# Altium PCB SRM_DOUBLE_V2_POWER.PCBDOC (part 1 of 2)
Units mil, origin at the board's own origin, x right, y up, seen from the top; angles counter-clockwise.
Board outline 17360 x 20010 mil, 2 copper layers (Top Layer, Bottom Layer); 233 components, 244 nets, 635 pads, 83 vias.
Unrouted connection lines stored in the file: 49.
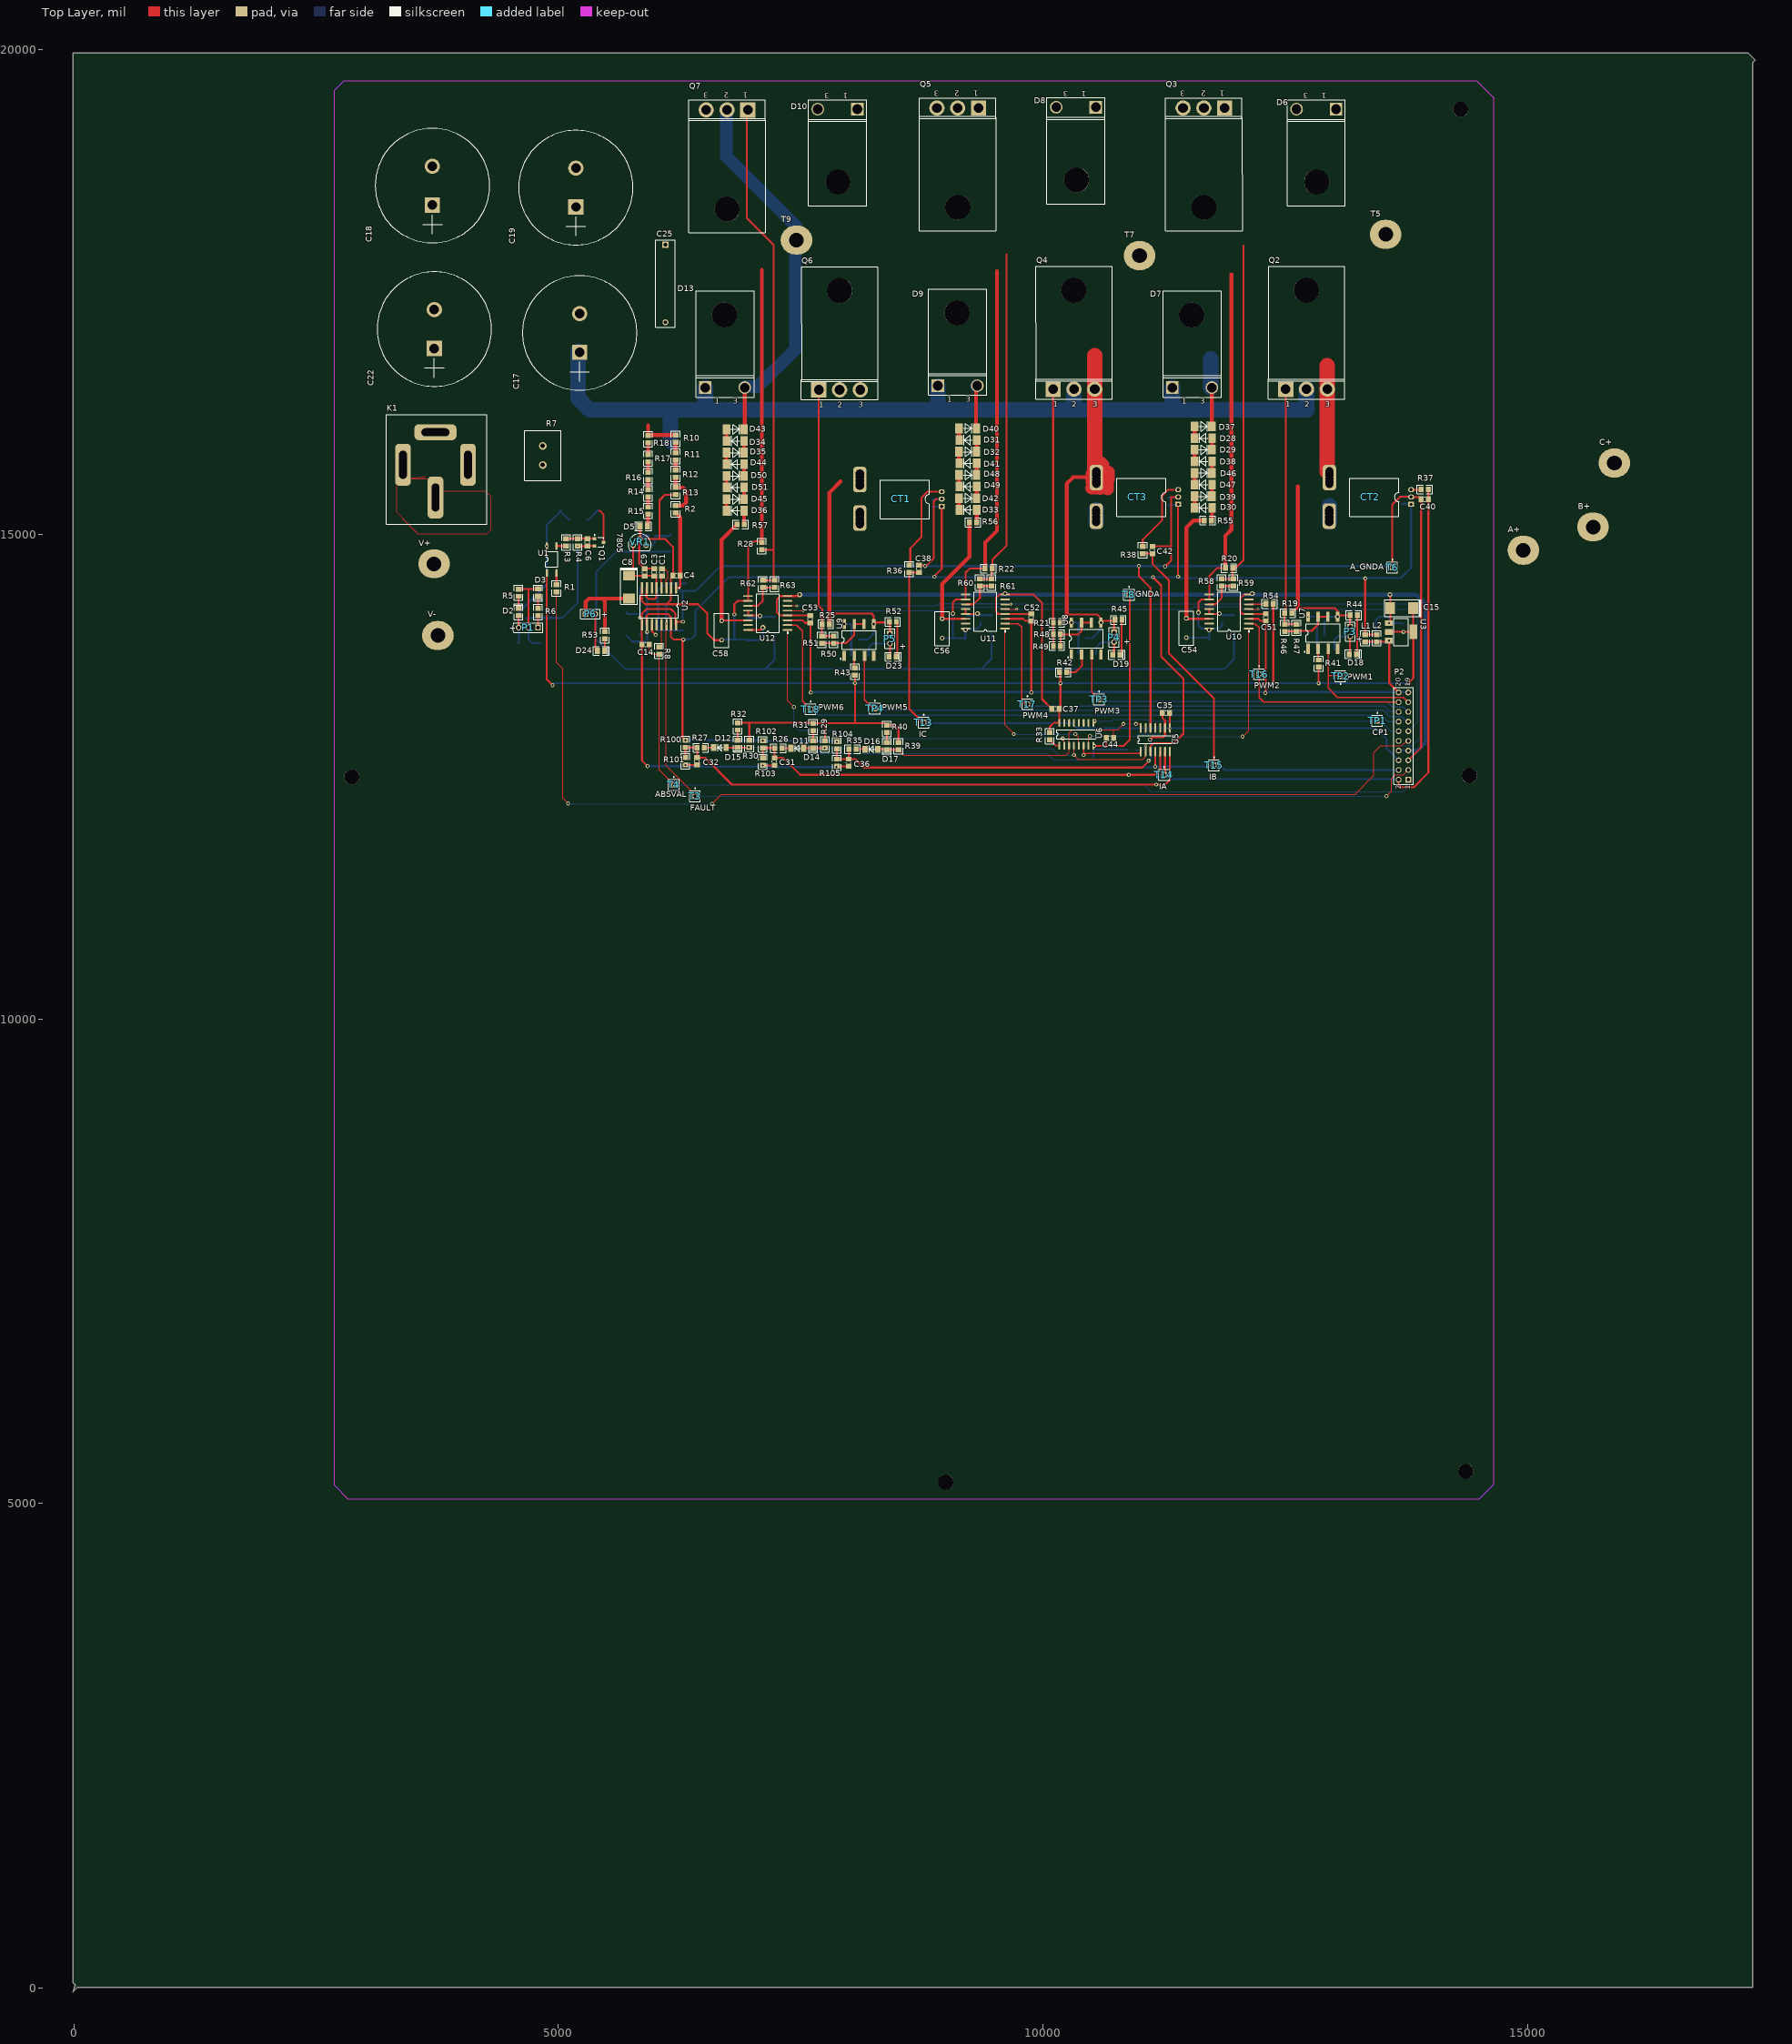
[diagram p0: Top Layer view]
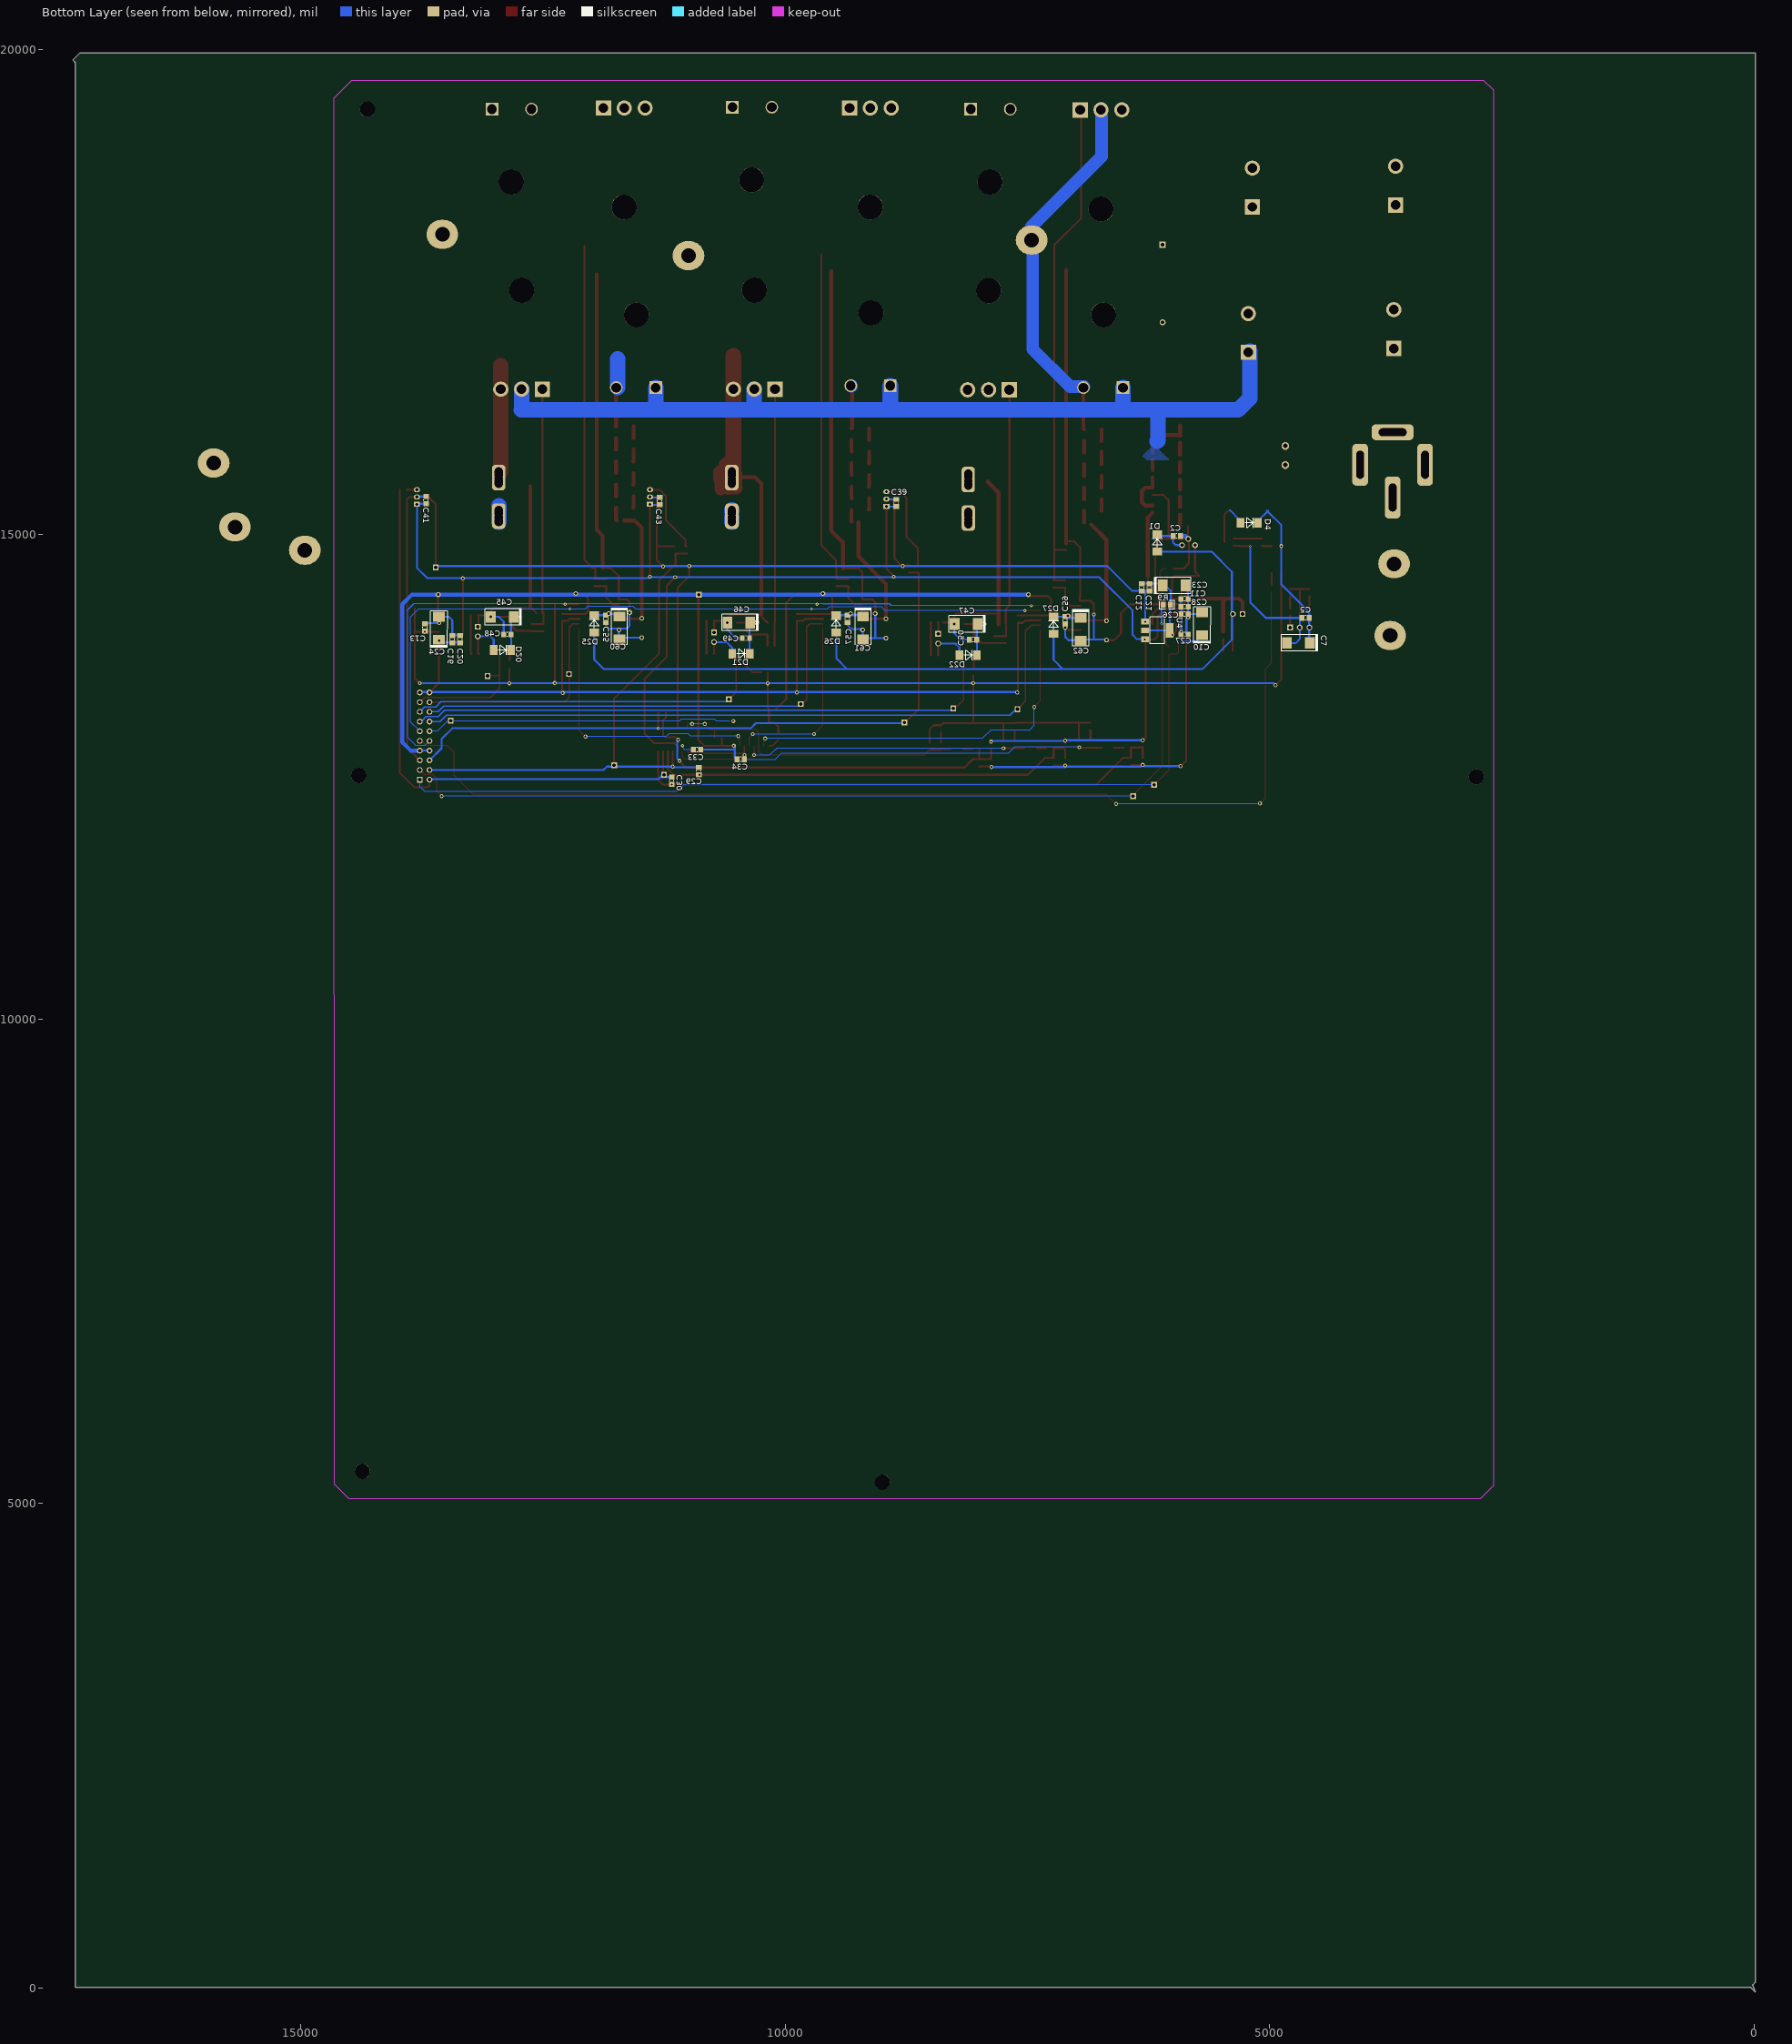
[diagram p1: Bottom Layer view, seen from below]

## Layer stack, top to bottom
Top Layer: signal copper 1.4
Dielectric: dielectric 12.6, FR-4, Dk 4.8
Bottom Layer: signal copper 1.4

## Board outline
-10,-40 40,10 17325,10 17325,19870 17350,19895 17275,19970 -10,19970 -10,60 15,35

## Design rules (kind name [scope] priority, off if disabled: settings)
Clearance [All] p1: gap=12
ComponentClearance [All] p1: gap=10 collisioncheckmode=3 verticalgap=10
HoleSize [All] p1: absolutevalues=TRUE maxlimit=500 minlimit=1 maxpercent=80.000 minpercent=20.000
PolygonConnect [All] p1: connectstyle=Relief reliefconductorwidth=10 reliefentries=4 polygonreliefangle="90 Angle"
RoutingVias [All] p1: holewidth=28 width=50 viastyle="Through Hole" minholewidth=10 minwidth=10 maxholewidth=28 maxwidth=50
SolderMaskExpansion [All] p1: expansion=4
TestPointUsage [All] p1: valid=0 allowmultiple=FALSE
Testpoint [All] p1: side=15 testpointundercomponent=TRUE minsize=40 maxsize=100 preferedsize=60 minholesize=0 maxholesize=40 preferedholesize=32 testpointgrid=1 style=1023 order=0-112345678
Width [All] p1: maxlimit=400 minlimit=10 preferedwidth=10
17 further rules are at their usual default settings.

## Classes and differential pairs
component class POWER_1.1: C1 C2 C3 C4 C5 C6 C7 C8 C9 C10 C11 C12 C13 C14 C15 C16 C17 C18 C19 C20 C21 C22 C23 C24 C25 C26 C27 C28 C29 C30 C31 C32 C33 C34 C35 C36 C37 C38 C39 C40 C41 C42 C43 C44 CT1 CT2 CT3 D1 D2 D3 D4 D5 D6 D7 D8 D9 D10 D11 D12 D13 D14 D15 D16 D17 Designator6 F1 K1 L1 L2 P1 P2 Q1 Q2 Q3 Q4 Q5 Q6 Q7 R1 R2 R3 R4 R5 R6 R7 R8 R9 R10 R11 R12 R13 R14 R15 R16 R17 R18 R19 R20 R21 R22 R25 R26 R27 R28 R29 R30 R31 R32 R33 R35 R36 R37 R38 R39 R40 R100 R101 R102 R103 R104 R105 T3 T4 T6 T7 T8 T9 T10 T11 T12 T13 T14 T15 TP1 U1 U2 U3 U4 U5 U6 V+ V- VR1
component class POWER_1.2: C45 C46 C47 C48 C49 C50 C51 C52 C53 C54 C55 C56 C57 C58 C59 C60 C61 C62 D18 D19 D20 D21 D22 D23 D24 D25 D26 D27 D28 D29 D30 D31 D32 D33 D34 D35 D36 D37 D38 D39 D40 D41 D42 D43 D44 D45 D46 D47 D48 D49 D50 D51 P3 P4 P5 P6 R41 R42 R43 R44 R45 R46 R47 R48 R49 R50 R51 R52 R53 R54 R55 R56 R57 R58 R59 R60 R61 R62 R63 T16 T17 T18 TP2 TP3 TP4 U7 U8 U9 U10 U11 U12
component class POWER_2.1: C63 C64 C65 C66 C67 C68 C69 C70 C71 C72 C73 C74 C75 C76 C77 C78 C79 C80 C81 C82 C83 C84 C85 C86 C87 C88 C89 C90 C91 CT4 CT5 CT6 D52 D53 D54 D55 D56 D57 D58 D59 D60 D61 D62 D63 D64 D65 F2 K2 L3 L4 P7 Q4 Q9 Q10 Q11 Q12 Q13 Q14 R64 R65 R66 R67 R68 R69 R70 R71 R72 R73 R74 R75 R76 R79 R80 R81 R82 R83 R84 R85 R86 R87 R89 R90 R91 R92 R93 R94 R200 R201 R202 R203 R204 R205 T19 T20 T21 T22 T23 T24 T25 T26 T27 T28 T29 T30 T31 TP5 U13 U14 U15 U16
component class POWER_2.2: C92 C93 C94 C95 C96 C97 C98 C99 C100 C101 C102 C103 C104 C105 C106 C107 C108 C109 D66 D67 D68 D69 D70 D71 D72 D73 D74 D75 D76 D77 D78 D79 D80 D81 D82 D83 D84 D85 D86 D87 D88 D89 D90 D91 D92 D93 D94 D95 D96 D97 D98 P8 P9 P10 R95 R96 R97 R98 R99 R106 R107 R108 R109 R110 R111 R112 R113 R114 R115 R116 R300 R301 R302 R303 R304 R305 T32 T33 T34 TP6 TP7 TP8 U17 U18 U19 U20 U21 U22

## Components (designator, comment, footprint, x,y, rotation, side; value= is the part's Value field where it differs from the comment)
A+ "Comment" TEM3 14920,14700 r270 top
B+ "Comment" TEM3 15640,14940 r270 top
C1 "104" C2012-0805 6070,14610 r90 top
C2 "104" C2012-0805 5960,14985 r0 bottom
C3 "104" C2012-0805 5990,14610 r90 top
C4 "103" C2012-0805 6220,14575 r180 top
C5 "104" C2012-0805 4630,14140 r0 bottom
C6 "104" C2012-0805 5300,14920 r90 top
C7 "10uF/25V" C_10UF/25V 4730,13880 r270 bottom
C8 "10uF/25V" C_10UF/25V 5730,14430 r0 top
C9 "104" C2012-0805 5890,14610 r270 top
C10 "104" C2012-0805 5876.96,14176.96 r180 bottom
C11 "104" C2012-0805 5880,14335 r0 bottom
C12 "104" C2012-0805 6320,14455 r90 bottom
C13 "104" C2012-0805 13715,14040 r270 bottom
C14 "104" C2012-0805 5900,13865 r0 top
C15 "10uF/25V" C_10UF/25V 13675,14240 r270 top
C16 "104" C2012-0805 13435,13920 r270 bottom
C17 "470uF" Rb400mil-450V 5220,17080 r90 top
C18 "470uF" Rb400mil-450V 3700,18600 r90 top
C19 "470uF" Rb400mil-450V 5180,18580 r90 top
C20 "104" C2012-0805 13355,13920 r270 bottom
C21 "104" C2012-0805 6240,14455 r90 bottom
C22 "470uF" Rb400mil-450V 3720,17120 r90 top
C23 "10uF/25V" C_10UF/25V 5960,14475 r90 bottom
C24 "10uF/25V" C_10UF/25V 13575,14060 r0 bottom
C25 "1uF" Rb800mil 6105,17590 r90 top
C26 "104" C2012-0805 5880,14255 r0 bottom
C27 "104" C2012-0805 5880,13965 r0 bottom
C28 "10uF/25V" C_10UF/25V 5700,14105 r0 bottom
C29 "102" C2012-0805 10890,12560 r270 bottom
C30 "102" C2012-0805 11170,12460 r270 bottom
C31 "104" C2012-0805 7230,12655 r90 top
C32 "104" C2012-0805 6430,12660 r90 top
C33 "102" C2012-0805 10910,12780 r0 bottom
C34 "102" C2012-0805 10460,12680 r180 bottom
C35 "102" C2012-0805 11270,13160 r180 top
C36 "104" C2012-0805 7995,12645 r90 top
C37 "104" C2012-0805 10130,13200 r0 top
C38 "104" C2012-0805 8720,14645 r270 top
C39 "104" C2012-0805 8855,15325 r90 bottom
C40 "104" C2012-0805 13940,15365 r0 top
C41 "104" C2012-0805 13705,15355 r90 bottom
C42 "104" C2012-0805 11130,14840 r270 top
C43 "104" C2012-0805 11295,15345 r90 bottom
C44 "102" C2012-0805 10690,12900 r0 top
C45 "10uF/25V" C_10UF/25V 12946.31,14148.33 r270 bottom
C46 "10uF/25V" C_10UF/25V 10505,14090 r270 bottom
C47 "10uF/25V" C_10UF/25V 8160,14075 r270 bottom
C48 "104" C2012-0805 12866.31,13968.33 r0 bottom
C49 "104" C2012-0805 10405,13930 r0 bottom
C50 "104" C2012-0805 8060,13915 r0 bottom
C51 "104" C2012-0805 12300,14145 r270 top
C52 "104" C2012-0805 9880,14145 r270 top
C53 "104" C2012-0805 7600,14125 r270 top
C54 "101" Rad-0.2 11480,14035 r270 top
C55 "104" C2012-0805 11850,14130 r90 bottom
C56 "101" Rad-0.2 8960,14030 r270 top
C57 "104" C2012-0805 9355,14130 r90 bottom
C58 "101" Rad-0.2 6685,14010 r270 top
C59 "104" C2012-0805 7110,14115 r90 bottom
C60 "10uF/25V" C_10UF/25V 11710,14010 r180 bottom
C61 "10uF/25V" C_10UF/25V 9195,14010 r180 bottom
C62 "10uF/25V" C_10UF/25V 6950,13995 r180 bottom
C+ "Comment" TEM3 15860,15600 r270 top
CT1 "ACS758" ACS758-LCB-050U-PFF 8655,15365 r90 top
CT2 "ACS758" ACS758-LCB-050U-PFF 13500,15385 r90 top
CT3 "ACS758" ACS758-LCB-050U-PFF 11095,15385 r90 top
D1 "IN4007" DIODE4007 6160,14905 r90 bottom
D2 "" LED-SMD 4590,14200 r270 top
D3 "" LED-SMD 4790,14400 r90 top
D4 "IN4007" DIODE4007 5220,15120 r180 bottom
D5 "LED" LED-SMD 5880,15085 r0 top
D6 "MUR60120" DIO40A1200V 12820,18900 r90 top
D7 "MUR60120" DIO40A1200V 11540,17005 r270 top
D8 "MUR60120" DIO40A1200V 10340,18920 r90 top
D9 "MUR60120" DIO40A1200V 9120,17025 r270 top
D10 "MUR60120" DIO40A1200V 7880,18900 r90 top
D11 "IN4148" IN4148 7470,12795 r180 top
D12 "IN4148" IN4148 6670,12800 r180 top
D13 "MUR60120" DIO40A1200V 6720,17005 r270 top
D14 "OCA" LED-SMD 7630,12835 r90 top
D15 "OCA" LED-SMD 6850,12840 r90 top
D16 "IN4148" IN4148 8235,12785 r180 top
D17 "OCA" LED-SMD 8390,12815 r90 top
D18 "" LED-SMD 13200,13765 r180 top
D19 "" LED-SMD 10759,13760 r180 top
D20 "IN4007" DIODE4007 12926.31,13808.33 r180 bottom
D21 "IN4007" DIODE4007 10465,13770 r180 bottom
D22 "IN4007" DIODE4007 8120,13755 r180 bottom
D23 "" LED-SMD 8451,13740 r180 top
D24 "" LED-SMD 5440,13800 r180 top
D25 "IN4007" DIODE4007 11970,14070 r90 bottom
D26 "IN4007" DIODE4007 9475,14070 r90 bottom
D27 "IN4007" DIODE4007 7230,14055 r90 bottom
D28 "UF4007" DIODE4007 11665,15995 r180 top
D29 "UF4007" DIODE4007 11645,15875 r0 top
D30 "UF4007" DIODE4007 11665,15275 r180 top
D31 "UF4007" DIODE4007 9235,15975 r180 top
D32 "UF4007" DIODE4007 9215,15855 r0 top
D33 "UF4007" DIODE4007 9235,15255 r180 top
D34 "UF4007" DIODE4007 6835,15965 r180 top
D35 "UF4007" DIODE4007 6815,15845 r0 top
D36 "UF4007" DIODE4007 6835,15245 r180 top
D37 "UF4007" DIODE4007 11645,16115 r0 top
D38 "UF4007" DIODE4007 11665,15755 r180 top
D39 "UF4007" DIODE4007 11645,15395 r0 top
D40 "UF4007" DIODE4007 9215,16095 r0 top
D41 "UF4007" DIODE4007 9235,15735 r180 top
D42 "UF4007" DIODE4007 9215,15375 r0 top
D43 "UF4007" DIODE4007 6815,16085 r0 top
D44 "UF4007" DIODE4007 6835,15725 r180 top
D45 "UF4007" DIODE4007 6815,15365 r0 top
D46 "UF4007" DIODE4007 11645,15635 r0 top
D47 "UF4007" DIODE4007 11665,15515 r180 top
D48 "UF4007" DIODE4007 9215,15615 r0 top
D49 "UF4007" DIODE4007 9235,15495 r180 top
D50 "UF4007" DIODE4007 6815,15605 r0 top
D51 "UF4007" DIODE4007 6835,15485 r180 top
K1 "Comment" Relay2 4460,15620 r0 top
L1 "10uH" R2012-0805 13325,13930 r90 top
L2 "10uH" R2012-0805 13445,13930 r90 top
P1 "Header 3" HDR1X3 4790,14040 r180 top
P2 "Header 10X2" HDR2X10 13770,12470 r90 top
P3 "Header 2" HDR1X2 13171.31,14048.33 r270 top
P4 "Header 2" HDR1X2 10734,13990 r270 top
P5 "Header 2" HDR1X2 8421,13975 r270 top
P6 "Header 2" HDR1X2 5280,14180 r0 top
Q1 "8050" NPN8050 5420,14920 r270 top
Q2 "Comment" "IGBT TO247 40A 1200V" 12720,16920 r90 top
Q3 "Comment" "IGBT TO247 40A 1200V" 11660,18980 r270 top
Q4 "Comment" "IGBT TO247 40A 1200V" 10320,16920 r90 top
Q5 "Comment" "IGBT TO247 40A 1200V" 9120,18980 r270 top
Q6 "Comment" "IGBT TO247 40A 1200V" 7902,16914 r90 top
Q7 "Comment" "IGBT TO247 40A 1200V" 6740,18960 r270 top
R1 "1K" R2012-0805 4980,14445 r270 top
R2 "39R" R2012-0805 6210,15262.6 r270 top
R3 "3K" R2012-0805 5080,14920 r270 top
R4 "1K" R2012-0805 5200,14920 r90 top
R5 "3K" R2012-0805 4590,14400 r270 top
R6 "3K" R2012-0805 4790,14200 r90 top
R7 "47R" AXIAL-1*1.3 4840,15820 r270 top
R8 "1K" R2012-0805 6040,13800 r270 top
R9 "4K7" R2012-0805 6060,14275 r180 bottom
R10 "1M" R2012-0805 6210,15987.6 r90 top
R11 "1M" R2012-0805 6210,15807.6 r90 top
R12 "1M" R2012-0805 6210,15627.6 r90 top
R13 "3K" R2012-0805 6210,15447.6 r90 top
R14 "10K" R2012-0805 5925,15425 r90 top
R15 "10K" R2012-0805 5925,15245 r90 top
R16 "10K" R2012-0805 5925,15605 r270 top
R17 "10K" R2012-0805 5925,15785 r270 top
R18 "10K" R2012-0805 5925,15985 r270 top
R19 "10K" R2012-0805 12530,14190 r180 top
R20 "10K" R2012-0805 11920,14655 r0 top
R21 "10K" R2012-0805 10145,14090 r180 top
R22 "10K" R2012-0805 9440,14650 r0 top
R25 "10K" R2012-0805 7760,14075 r180 top
R26 "510K" R2012-0805 7270,12795 r180 top
R27 "510K" R2012-0805 6470,12800 r180 top
R28 "10K" R2012-0805 7100,14880 r270 top
R29 "4K7" R2012-0805 7750,12835 r90 top
R30 "4K7" R2012-0805 6970,12840 r90 top
R31 "1K" R2012-0805 7630,13015 r90 top
R32 "1K" R2012-0805 6850,13020 r90 top
R33 "1K" R2012-0805 10070,12920 r90 top
R35 "510K" R2012-0805 8035,12785 r180 top
R36 "1K" R2012-0805 8620,14645 r270 top
R37 "1K" R2012-0805 13940,15465 r0 top
R38 "1K" R2012-0805 11030,14840 r270 top
R39 "4K7" R2012-0805 8510,12815 r90 top
R40 "1K" R2012-0805 8390,12995 r90 top
R41 "200R" R2012-0805 12846.31,13668.33 r270 top
R42 "200R" R2012-0805 10210,13580 r180 top
R43 "200R" R2012-0805 8060,13585 r270 top
R44 "3K" R2012-0805 13206.31,14168.33 r0 top
R45 "3K" R2012-0805 10779,14120 r0 top
R46 "100R" R2012-0805 12496.32,14038.33 r270 top
R47 "100R" R2012-0805 12616.31,14038.33 r270 top
R48 "100R" R2012-0805 10145,13970 r0 top
R49 "100R" R2012-0805 10145,13850 r0 top
R50 "100R" R2012-0805 7840,13915 r270 top
R51 "100R" R2012-0805 7720,13915 r270 top
R52 "3K" R2012-0805 8451,14100 r0 top
R53 "3K" R2012-0805 5480,13960 r270 top
R54 "10K" R2012-0805 12340,14285 r0 top
R55 "100R" R2012-0805 11700,15145 r180 top
R56 "100R" R2012-0805 9280,15125 r180 top
R57 "100R" R2012-0805 6880,15105 r180 top
R58 "100R" R2012-0805 11845,14505 r270 top
R59 "100R" R2012-0805 11965,14505 r270 top
R60 "100R" R2012-0805 9350,14505 r270 top
R61 "100R" R2012-0805 9470,14505 r270 top
R62 "100R" R2012-0805 7110,14490 r270 top
R63 "100R" R2012-0805 7230,14490 r270 top
R100 "20K" R2012-0805 6310,12840 r270 top
R101 "10K" R2012-0805 6310,12660 r270 top
R102 "20K" R2012-0805 7110,12835 r270 top
R103 "10K" R2012-0805 7110,12655 r270 top
R104 "20K" R2012-0805 7875,12825 r270 top
R105 "10K" R2012-0805 7875,12645 r270 top
T3 "FAULT" PIN1 6410,12300 r0 top
T4 "ABSVAL" PIN1 6192.23,12417.77 r0 top
T5 "Comment" TEM3 13500,17960 r270 top
T6 "A_GNDA" PIN1 13605,14660 r0 top
T7 "Comment" TEM3 10960,17740 r270 top
T8 "GNDA" PIN1 10890,14380 r0 top
T9 "Comment" TEM3 7420,17900 r270 top
T13 "IC" PIN1 8770,13060 r0 top
T14 "IA" PIN1 11250,12520 r0 top
T15 "IB" PIN1 11765,12620 r0 top
T16 "PWM2" PIN1 12230,13560 r0 top
T17 "PWM4" PIN1 9840,13250 r0 top
T18 "PWM6" PIN1 7602.5,13197.5 r0 top
TP1 "CP1" PIN1 13450,13080 r0 top
TP2 "PWM1" PIN1 13070,13540 r180 top
TP3 "PWM3" PIN1 10580,13300 r0 top
TP4 "PWM5" PIN1 8265,13205 r0 top
U1 "TLP181" TLP181 4880,14605 r90 top
U2 "HCPL788J" HCPL788J 6040,14260 r90 top
U3 "1117-3.3V" 1117-3.3V 13695,14000 r270 top
U4 "1117-3.3V" 1117-3.3V 6160,14015 r270 bottom
U5 "LM339" LM339 11010,12760 r90 top
U6 "74HC174" 74HC174 10170,12820 r90 top
U7 "HCPL3120" HCPL3120 12886.31,13988.33 r90 top
U8 "HCPL3120" HCPL3120 10445,13930 r90 top
U9 "HCPL3120" HCPL3120 8100,13915 r90 top
U10 "HCPL316J" HCPL316J 12150,14030 r180 top
U11 "HCPL316J" HCPL316J 9635,14030 r180 top
U12 "HCPL316J" HCPL316J 7390,14015 r180 top
V+ "Comment" TEM3 3680,14560 r270 top
V- "Comment" TEM3 3720,13820 r270 top
VR1 "7805" MC78L05 5840,14905 r270 top

## Footprints (in the part's own frame and the unit in brackets; to place one, negate y for a bottom-side part, rotate by r counter-clockwise, add the part's x,y. Pads: shape width x height; smd on the part's side, far side on the other; paste and mask are expansions set on the pad)
74HC174 [mm]
  rect 2x0.5 smd: 1(0,0)
  oval 2x0.5 smd: 2(0,-1.27) 3(0,-2.54) 4(0,-3.81) 5(0,-5.08) 6(0,-6.35) 7(0,-7.62) 8(0,-8.89) 9(6,-8.89) 10(6,-7.62) 11(6,-6.35) 12(6,-5.08) 13(6,-3.81) 14(6,-2.54) 15(6,-1.27) 16(6,0)
  silkscreen extent 1.84,-9.53 4.17,0.64
1117-3.3V [mil]
  rect 59x79 smd: 1(-85.81,-124.94) 2(4.74,-124.94) 3(95.29,-124.94)
  rect 150x79 smd: 4(4.07,128.61)
  silkscreen extent -135,-73 145,77
ACS758-LCB-050U-PFF [mm]
  rect 1.3x1.6 hole 0.8: 1(-1.88,-7.62)
  oval 1.3x1.6 hole 0.8: 2(0.036,-7.62) 3(1.952,-7.62)
  rrect50% 3.5x3.5 hole 2.2: 4(3.531,13.818) 4(4.039,13.818) 4(4.826,13.818) 4(5.74,13.818) 4(6.375,13.818) 4(6.731,13.818) 5(-6.553,13.843) 5(-6.045,13.843) 5(-5.258,13.843) 5(-4.343,13.843) 5(-3.708,13.843) 5(-3.353,13.843)
  silkscreen extent -5.11,-4.43 5,8.48
AXIAL-1*1.3 [mm] "1cm*1.3cm  5W立式水泥电阻"
  round 2 hole 1.2: 1(-2.388,-0.025) 2(2.616,-0.025)
  silkscreen extent -6.43,-4.72 6.68,4.72
C2012-0805 [mm]
  rect 1.3x1.5 smd: 1(-0.95,0) 2(0.95,0)
  silkscreen extent -0.1,-0.58 0.1,0.58
C_10UF/25V [mil] "3mm*10mm焊盘"
  rect 120x100 smd: 1(-1,145) 2(-1,-91)
  silkscreen extent -87,-148 84,227
DIO40A1200V [mil]
  rect 130x130 hole 100: 1(489,-205)
  round 130 hole 100: 3(489,203)
  round 260 hole 260: ""(-261,-6)
  silkscreen extent -508,-300 587,300
DIODE4007 [mil] "间距5.08，宽2.54，贴片"
  rect 78.74x100 smd: 1(-81,0) 2(99,0)
  silkscreen extent -36,-50 60,50
HCPL316J [mm]
  rect 2.5x0.457 smd: 1(0.635,0)
  oval 2.5x0.457 smd: 2(0.635,-1.27) 3(0.635,-2.54) 4(0.635,-3.81) 5(0.635,-5.08) 6(0.635,-6.35) 7(0.635,-7.62) 8(0.635,-8.89) 9(10.995,-8.89) 10(10.995,-7.62) 11(10.995,-6.35) 12(10.995,-5.08) 13(10.995,-3.81) 14(10.995,-2.54) 15(10.995,-1.27) 16(10.995,0)
  silkscreen extent 0.4,-9.53 8.8,0.94
HCPL788J [mil]
  rect 118.11x23.62 smd: 1(190,-174) 2(190,-124) 3(190,-74) 4(190,-24) 5(190,26) 6(190,76) 7(190,126) 8(190,176) 9(-190,176) 10(-190,126) 11(-190,76) 12(-190,26) 13(-190,-24) 14(-190,-74) 15(-190,-124) 16(-190,-174)
  silkscreen extent -118,-212 195,198
HCPL3120 [mil]
  rect 104.65x35.75 smd: 1(-168.33,151.31) 2(-168.33,46.31) 3(-168.33,-58.69) 4(-168.33,-153.69) 5(161.67,-153.69) 6(161.67,-53.69) 7(161.67,46.31) 8(161.67,151.31)
  silkscreen extent -203,-179 93,191
HDR1X2 [mm] "Connector; Header; 2 Position"
  rect 1.5x1.5 hole 0.9: 1(0,0)
  round 1.5 hole 0.9: 2(2.54,0)
  silkscreen extent -1.27,-1.27 3.81,1.27
HDR1X3 [mm] "Connector; Header; 3 Position"
  rect 1.5x1.5 hole 0.9: 1(0,0)
  round 1.5 hole 0.9: 2(2.54,0) 3(5.08,0)
  silkscreen extent -1.27,-1.27 6.35,1.27
HDR2X10 [mm] "Connector; Header; 10x2 Position"
  rect 1.5x1.5 hole 0.9: 1(0,0)
  round 1.5 hole 0.9: 2(0,2.54) 3(2.54,0) 4(2.54,2.54) 5(5.08,0) 6(5.08,2.54) 7(7.62,0) 8(7.62,2.54) 9(10.16,0) 10(10.16,2.54) 11(12.7,0) 12(12.7,2.54) 13(15.24,0) 14(15.24,2.54) 15(17.78,0) 16(17.78,2.54) 17(20.32,0) 18(20.32,2.54) 19(22.86,0) 20(22.86,2.54)
  silkscreen extent -1.27,-1.27 24.13,3.81
"IGBT TO247 40A 1200V" [mil]
  rect 157.56x157.56 hole 100: 1(-421,215)
  round 157.56 hole 100: 2(-421,0.43) 3(-421,-214.13)
  round 260 hole 260: ""(601.61,1.18)
  silkscreen extent -523,-395 847,396
IN4148 [mm] "贴片"
  rect 1.4x1.8 smd: 1(-1.549,0) 2(1.753,0)
  silkscreen extent -0.76,-0.89 0.89,0.89
LED-SMD [mm] "贴片LED，0805"
  rect 1.3x1.6 smd: 1(0.975,0) 2(-0.925,0)
  silkscreen extent -2.21,-1.15 2.03,1.15
LM339 [mm] "SO14"
  rect 2.5x0.5 smd: 1(0,0)
  oval 2.5x0.5 smd: 2(0,-1.27) 3(0,-2.54) 4(0,-3.81) 5(0,-5.08) 6(0,-6.35) 7(0,-7.62) 8(6.2,-7.62) 9(6.2,-6.35) 10(6.2,-5.08) 11(6.2,-3.81) 12(6.2,-2.54) 13(6.2,-1.27) 14(6.2,0)
  silkscreen extent 2.08,-8.25 4.12,0.64
MC78L05 [mm] "小电流三端稳压"
  round 1.5 hole 0.9: 1(0.381,1.651) 2(-1.27,0) 3(0.381,-1.778)
  silkscreen extent -2.61,-3.03 1.79,2.97
NPN8050 [mm] "SOT23"
  rect 0.85x1 smd: 1(-0.95,-1.2) 2(0.95,-1.2) 3(0,1.2)
  silkscreen extent -2.05,-1.32 1.28,1.2
PIN1 [mm] "Connector; Plug"
  rect 1.5x1.5 hole 0.9: 1(0,0)
  silkscreen extent -1.4,-1.4 1.4,2.17
R2012-0805 [mm]
  rect 1.3x1.5 smd: 1(-0.95,0) 2(0.95,0)
  silkscreen extent -2,-1.15 2,1.15
Rad-0.2 [mm] "Jumper Wire; 2 Leads"
  round 1.2 hole 0.7: 1(-2.54,0) 2(2.54,0)
  silkscreen extent -4.44,-1.91 4.44,1.91
Rb400mil-450V [mm] "脚距10mm，轮廓直径30mm，450V铝电解"
  rect 4x4 hole 2.5: 1(-5.08,0)
  round 4 hole 2.5: 2(5.08,0)
  silkscreen extent -15,-15 15,15
Rb800mil [mm] "脚距20mm，630V CBB"
  round 1.549 hole 0.898: 1(-10.16,0)
  rect 1.6x1.6 hole 1: 2(10.16,0)
  silkscreen extent -11.43,-2.54 11.43,2.54
Relay2 [mm] "12V   80A  电磁继电器"
  rrect50% 11x4.1 hole 2 slot 7.3 at 0 deg: 1(-18.508,11.05)
  rrect50% 4.1x11 hole 2 slot 7.3 at 90 deg: 2(-27.011,2.546) 3(-9.996,2.546) 4(-18.503,-6.029)
  silkscreen extent -31.34,-12.99 -5.01,15.7
TEM3 [mil]
  oval 298.9x326.46 hole 150.73: 1(-137.76,36.85)
TLP181 [mm]
  rect 2x0.6 smd: 1(0,0)
  oval 2x0.6 smd: 3(0,-2.54) 4(7,-2.54) 6(7,0)
  silkscreen extent 1.52,-2.84 5.54,0.28

## Part data
C1 C2 C3 C4 C5 C6 C9 C10 C11 C12 C13 C14 C16 C20 C21 C26 C27 C29 C30 C31 C32 C33 C34 C35 C36 C37 C38 C39 C40 C41 C42 C43 C44 C48 C49 C50 C51 C52 C53 C54 C55 C56 C57 C58 C59: library part Cap, "普通电容"
C7 C8 C15 C23 C24 C28 C45 C46 C47 C60 C61 C62: library part "Cap tan", "钽电解"
C17 C18 C19 C22: library part "Cap pol1", "大电解电容"
C25: library part "Cap CBB", "CBB电容"
D1 D4 D20 D21 D22 D25 D26 D27 D28 D29 D30 D31 D32 D33 D34 D35 D36 D37 D38 D39 D40 D41 D42 D43 D44 D45 D46 D47 D48 D49 D50 D51: library part "Diode IN4007", "普通整流二极管"
D2 D3 D14 D15 D17 D18 D19 D23 D24: library part LED
D6 D7 D8 D9 D10 D13: library part "Diode HFA08TB60"
D11 D12 D16: library part "Diode IN4148", "开关二极管"
L1 L2: library part Inductor
P1: "Header, 3-Pin"
P2: "Header, 10-Pin, Dual row"
P3 P4 P5 P6: "Header, 2-Pin"
Q1: library part NPN8050
R1 R2 R3 R4 R5 R6 R7 R8 R9 R10 R11 R12 R13 R14 R15 R16 R17 R18 R19 R20 R21 R22 R25 R26 R27 R28 R29 R30 R31 R32 R33 R35 R36 R37 R38 R39 R40 R41 R42 R43 R44 R45 R46 R47 R48 R49 R50 R51 R52 R53 R54 R55 R56 R57 R58 R59 R60 R61 R62 R63 R100 R101 R102 R103 R104 R105: library part Res
T3 T4 T6 T8 T13 T14 T15 T16 T17 T18 TP1 TP2 TP3 TP4: library part TP, "测试脚"
U3 U4: library part 1117
U6: "带公共时钟和复位六D触发器"
VR1: library part VR78, "三端稳压"

## Free pads (board coordinates)
  round 157.48 hole 157.48: 0(2868,12499) 0(8996,5221) 0(14311,19388) 0(14363,5334) 0(14399,12513)

## Via types
v1: diameter 40, hole 20, Top Layer to Bottom Layer, 55 vias
v2: diameter 50, hole 28, Top Layer to Bottom Layer, 17 vias
v3: diameter 30, hole 15, Top Layer to Bottom Layer, 10 vias
v4: diameter 20, hole 10, Top Layer to Bottom Layer, 1 vias

## Nets (pads, with @x,y where several pads share a name; then routed paths per layer and width w, separated by ;. In a path a pad name is that pad's centre, name@x,y a point inside that pad or via, vN(x,y) a via of type N, cw(c..) or ccw(c..) an arc to the next point about the centre after c; other vN are vias at no path point)
+5VA: C16.2 C20.2 C24.1 C51.2 C52.2 C53.2 L1.1 L2.1 P2.19 P2.20 U3.3 U10.3 U11.3 U12.3 | length 10164.2
  Top Layer w20: U12.3@7365,14115 7520,14115 7547.4,14087.6 C53.2@7600,14087.6 7600,13370 v1@7600,13365 ; U11.3@9610,14130 9795,14130 9817.4,14107.6 C52.2@9880,14107.6 v1(9880,13370) v1@9885,13365 ; U10.3@12125,14130 12225,14130 12247.4,14107.6 C51.2@12300,14107.6 12300,13370 v1(12295,13365) ; L1.1@13325,13892.6 L2.1@13445,13892.6 13557.95,13892.6 v1(13570.06,13904.71) ; U3.3@13574,13915 13574,13904.71 13574,13466 P2.20@13670,13370
  Bottom Layer w20: v1@7595,13360 v1(7605,13370) 7610,13375 9880,13375 12295,13375 13670,13375 13765,13375 P2.19@13770,13370 ; 13390,13882.6 C16.2@13435,13882.6 C24.1@13547.95,13882.6 ; v1(13570.06,13904.71) C24.1@13547.95,13882.6 ; C24.1@13582.95,13882.6 13574,13882.6 13570.06,13882.6 C24.1@13547.95,13882.6
+5VB: 
+12: C5.1 C7.1 D2.1 D4.2 K1.2 P1.3 U1.6 | length 1804.3
  Top Layer w20: P1.3@4590,14040 D2.1@4590,14161.6
  Bottom Layer w20: C7.1@4585,13881 4592.6,13888.6 4592.6,14040 P1.3@4592.6,14042.6 ; P1.3@4590,14040 P1.3@4592.6,14042.6 ; 5017,15245 5017,15244 5022.5,15238.5 ; 5030,15246 5022.5,15238.5 ; D4.2@5108,15153 5022.5,15238.5 ; P1.3@4592.6,14042.6 C5.1@4592.6,14140 4592.6,14197.6 4880,14485 v1(4880,14880) 4880,15096 5022.5,15238.5
-12: P1.1 R6.1 | length 122.6
  Top Layer w20: P1.1@4790,14040 R6.1@4790,14162.6
/FAULT: P2.3 R9.1 T3.1 U2.14 | length 9652.5
  Top Layer w10: U2.14@6109,14070 6109,12616 T3.1@6410,12315 ; v1(13545,12300) 13595,12350 13595,12480 13635,12520 13720,12520 P2.3@13770,12570
  Bottom Layer w10: T3.1@6410,12300 v1(13545,12300) ; P2.3@13755,12570 P2.3@13770,12570
  Bottom Layer w20: R9.1@6097.4,14275 R9.1@6109,14263.4 ; v3@6109,14070 v3@6109,14080 ; v3(6115,14080) R9.1@6115,14263.4
A+3.3VA: C12.2 C21.2 C23.1 R9.2 U2.11 U4.2 U4.4 | length 1137.7
  Top Layer w20: U2.11@5964,14070 5964,14005 v1(6004,13965)
  Bottom Layer w20: U4.4@6031.39,14010.93 6284.26,14010.93 U4.2@6284.94,14010.26 ; C12.2@6320,14492.4 C21.2@6240,14492.4 6123.4,14492.4 C23.1@6105,14474 6074,14474 6022.6,14422.6 R9.2@6022.6,14275 6030.39,14267.21 6030.39,14070.93 U4.4@6029.46,14070 ; U4.4@6029.46,14070 6029.46,14032.86 6031.39,14030.93 6031.39,14068.07 U4.4@6029.46,14070
A+5VA: C10.1 C11.2 C26.2 C27.2 C28.1 C39.1 C41.1 C43.1 CT1.1 CT2.1 CT3.1 L1.2 L2.2 R100.1 R102.1 R104.1 U2.10 U2.15 U4.3 U5.3 | length 17421
  Top Layer w20: U2.10@5909,14070 5909,14156 5934,14181 6129,14181 6159,14151 6159,14070 6159,13946 6190,13915 v1@6280,13915 ; v1(6290,13915) v1@6280,13915 ; v1(6310,12877.4) 6280,12907.4 v1@6280,13915 ; v1(8880,14565) 8880,14570 8955,14645 CT1.1@8955,15291 ; U5.3@11110,12760 11110,12815 11140,12845 11350,12845 11450,12945 11450,13510 11220,13740 11220,14475 v1(11135,14560) ; v1(11395,14565) CT3.1@11395,15311 ; v1@13325,14547 L1.2@13325,13967.4 L2.2@13445,13967.4
  Bottom Layer w20: C28.1@5699,13960 5764,13895 5895,13895 5917.4,13917.4 C27.2@5917.4,13965 5909,13973.4 5909,13995 5909,14171.6 C10.1@5914.36,14176.96 5914.36,14251.96 C26.2@5917.4,14255 C11.2@5917.4,14335 ; 5909,14061.21 ccw(c5950.21,14061.21) 5921.07,14032.07 ; U4.3@6284.94,13910 U4.3@6285,13910 ; U4.3@6284.94,13919.71 6290,13919.71 6369.71,13919.71 6415,13965 6415,14215 6760,14560 8880,14560 v1(11135,14560) 11395,14560 11400,14560 11410,14550 13326,14550 13693,14550 13799,14656 13799,15311 13799,15317.6 C41.1@13705,15317.6 ; v1(6310,12877.4) 7105,12877.4 v1(7110,12872.4) 7112.4,12870 v1@7867.4,12870 ; U4.3@6315,13910 6290,13910 U4.3@6285,13910 ; U4.3@6315,13915 v1(6290,13915) 6289.82,13914.82 U4.3@6285,13910 ; C39.1@8855,15287.6 8951.6,15287.6 CT1.1@8955,15291 ; C43.1@11295,15307.6 11391.6,15307.6 CT3.1@11395,15311
  other v1: 7875,12862.4 5915,13995 13326,14547
A+5VB: 
A_GNDA: C10.2 C11.1 C12.1 C14.1 C21.1 C23.2 C26.1 C27.1 C28.2 C31.1 C32.1 C36.1 C38.1 C39.2 C40.1 C41.2 C42.1 C43.2 CT1.2 CT2.2 CT3.2 P2.5 R101.2 R103.2 R105.2 T6.1 U2.9 U2.16 U4.1 U5.12 | length 20551
  Top Layer w20: v1(5920,12610) 5862.6,12667.4 C14.1@5862.6,13865 5859,13868.6 5859,14070 5859,14142 5859,14182 5908,14231 6161,14231 6209,14183 U2.16@6209,14080 ; U2.16@6209,14070 U2.16@6209,14080 ; v1(6285,14100) 6229,14100 U2.16@6209,14080 ; v1(6310,12622.6) C32.1@6430,12622.6 ; v1(7110,12617.6) C31.1@7230,12617.6 ; R105.2@7875,12607.6 C36.1@7995,12607.6 ; C38.1@8720,14682.4 v1@8785,14682.4 ; v1(8785,14675) 8795,14675 8873,14753 8873,15339.85 8899.57,15366.43 8911.46,15366.43 ; v1(10990,14675) 10990,14570 11110,14450 U5.12@11110,13004.09 ; C42.1@11142.6,14880 11319,14880 11324,14885 ; v1(11260,14670) v1@11265,14665 ; v1@11267.07,14677.07 11324,14734 11324,14885 ; 11321.43,15386.43 11331,15386.43 ; CT3.2@11395,15386.43 11331,15386.43 ; T6.1@13605,14655 T6.1@13605,14660 13605,15310 13685,15390 CT2.2@13790,15390 ; P2.5@13770,12670 13902.6,12802.6 C40.1@13902.6,15365 13881.17,15386.43 CT2.2@13800,15386.43 ; 11324,14885 11324,15379.43 11331,15386.43
  Bottom Layer w20: C28.2@5699,14196 5715,14180 5839.56,14180 C10.2@5842.6,14180 ; C10.2@5839.56,14176.96 C10.2@5842.6,14180 ; C27.1@5842.6,13965 5859,13981.4 v1@5859,14135 ; C23.2@5869,14474 5842.6,14447.6 C11.1@5842.6,14335 C26.1@5842.6,14255 C10.2@5842.6,14180 ; v1(5920,12610) 6297.4,12610 v1(6310,12622.6) 6327.6,12605 7100,12605 7105,12600 7110,12600 v1(7870,12600) ; C21.1@6240,14417.6 6280,14417.6 ; U4.1@6284.94,14100.81 6283.94,14101.81 6283.94,14413.66 6280,14417.6 ; C12.1@6315,14415 C12.1@6320,14415 ; C39.2@8855,15362.4 8950.98,15362.4 CT1.2@8955,15366.43 ; C43.2@11290,15377.4 C43.2@11295,15382.4 11390.98,15382.4 CT3.2@11395,15386.43 ; T6.1@13610,14660 13607.5,14662.5 13595,14675 11260,14675 v1(10990,14675) v1(8785,14675) 6675,14675 6417.6,14417.6 C12.1@6320,14417.6 6280,14417.6 ; C41.2@13695,15382.4 C41.2@13705,15392.4 13794.02,15392.4 CT2.2@13800,15386.43
  other v1: 5842,14142
A_GNDB: 
ABSVAL: C14.2 P2.1 R8.2 T4.1 | length 9319.4
  Top Layer w10: C14.2@5937.4,13865 5937.4,13787.6 5962.4,13762.6 R8.2@6040,13762.6 ; R8.2@6040,13765 R8.2@6040,13762.6 ; T4.1@6205,12405 T4.1@6192.23,12417.77 6040,12570 R8.2@6040,13762.6
  Bottom Layer w10: T4.1@6192.23,12417.77 11047.23,12417.77 11120,12345 13715,12345 13770,12400 P2.1@13770,12470
AN_D: D7.3 D37.2 Q3.2 T5.1 | length 701.4
  Top Layer w40: D7.3@11743,16516 11744,16515 D37.2@11744,16115
  Bottom Layer w130: D7.3@11730,16510 D7.3@11730,16516
  Bottom Layer w160: D7.3@11730,16516 11730,16810
AN_G: Q3.1 R20.2 R58.1 R59.1 | length 3626.5
  Top Layer w20: R58.1@11845,14542.4 R59.1@11965,14542.4 11957.4,14550 R20.2@11957.4,14655 11990,14655 12070,14735 12070,17980
AN_S: C2.1 C3.2 C4.2 C8.2 C9.1 C17.2 C18.2 C19.2 C22.2 C25.1 C54.2 C55.1 C56.2 C57.1 C58.2 C59.1 C60.2 C61.2 C62.2 D5.2 D6.3 D8.3 D10.3 P6.1 Q3.3 Q5.3 Q7.3 R13.1 R20.1 R22.1 R28.1 R53.1 U2.2 U2.8 U10.9 U10.10 U10.16 U11.9 U11.10 U11.16 U12.9 U12.10 U12.16 V-.1 VR1.2 | length 18423.6
  Top Layer w20: C8.2@5722.6,14332.6 C8.2@5729,14339 ; 5835.57,14339 5859,14339 ; D5.2@5843.6,15085 5843.6,14958.6 VR1.2@5840,14955 ; U2.8@5859,14450 5859,14339 ; 5862.61,14339 5859,14339 ; C3.2@5990,14647.4 C9.1@5890,14647.4 5835,14702.4 5835,14950 VR1.2@5840,14955 ; R13.1@6210,15410.2 6100.2,15410.2 6043,15353 6043,14955 ; C58.2@6685,13910 6607,13910 6536,13981 6536,14186 6441,14281 6116,14281 ; v1(6815,14175) 6815,14280 6850,14315 U12.10@6957.13,14315 6960,14317.87 U12.9@6960,14365 ; U12.16@6957.13,14015 7085,14015 v2(7110,14040) ; U12.9@6957.13,14365 6957.13,14867.13 7020,14930 R28.1@7100,14930 ; v2(9070,14185) 9070,14300 9100,14330 U11.10@9202.13,14330 U11.9@9202.13,14380 9202.13,14607.13 9245,14650 R22.1@9402.6,14650 ; v2(11605,14195) 11605,14300 11635,14330 U10.10@11717.13,14330 U10.9@11717.13,14380 11717.13,14572.13 11800,14655 R20.1@11882.6,14655 ; VR1.2@5840,14955 6043,14955 ; 5859,14339 5859,14319 5897,14281 6116,14281 ; 6043,14955 6100,14955 6182.6,14872.4 C4.2@6182.6,14575 6159,14551.4 6159,14450 6159,14324 6116,14281
  Top Layer w40: P6.1@5280,14180 5280,14305 5315,14340 5453,14340 ; R53.1@5480,13997.4 5480,14313 5453,14340 ; C8.2@5722.6,14340 5453,14340 ; R28.1@7100,14910 R28.1@7100,14917.4 7100,14930 7100,17720 7100,17730 ; R22.1@9402.6,14650 9402.6,14917.6 9525,15040 9525,17715 ; R20.1@11882.6,14655 11882.6,14987.6 11945,15050 11945,17685
  Bottom Layer w20: C58.2@6685,13910 6690,13915 6815,13915 ; v1(6815,14175) 6815,13915 ; v2(7110,14040) 7110,13945 7075.13,13910.13 6957.13,13910.13 C62.2@6951,13904 6940,13915 6815,13915 ; C56.2@8960,13930 9070,13930 ; v2(9070,14185) 9070,13930 ; C57.1@9355,14092.6 9355,14065 9315,14025 9200,14025 v2(9200,14015) 9200,13923 C61.2@9196,13919 9185,13930 9070,13930 ; C54.2@11485,13930 C54.2@11480,13935 11707.25,13935 11712.25,13930 C60.2@11711,13930 ; v2(11605,14195) 11605,14060 11635,14030 11715,14030 v2@11717.13,14030 ; C60.2@11711,13919 11717.13,13925.13 11717.13,14015 v2@11717.13,14030 ; C55.1@11850,14092.6 11850,14065 11815,14030 v2@11717.13,14030
  Bottom Layer w40: VR1.2@5840,14955 5870,14985 C2.1@5922.6,14985
  other v2: 11715,14015
AP15V+: D18.1 D20.1 P3.2 | length 465.7
  Top Layer w20: D18.1@13161.6,13765 13167.91,13771.31 13167.91,13946.73 P3.2@13166.31,13948.33
  Bottom Layer w20: D20.1@13007.31,13808.33 13007.31,13914.33 13041.31,13948.33 P3.2@13166.31,13948.33
AP_G: Q2.1 R19.2 R46.1 R47.1 | length 2567.3
  Top Layer w20: R19.2@12505,14190 R19.2@12505,14202.4 ; Q2.1@12505,16504 R19.2@12505,14202.4 ; R47.1@12616.31,14075.73 R46.1@12496.32,14075.73 12492.6,14079.45 R19.2@12492.6,14190 R19.2@12505,14202.4
AP_S: C45.2 C48.2 CT2.4 D6.1 P3.1 Q2.3 R19.1 R44.1 U7.5 | length 3439.6
  Top Layer w20: R19.1@12567.4,14190 12617.4,14240 12630,14240 13010,14240 13040,14210 v2(13040,14150) ; U7.5@13055.73,14165.73 R44.1@13166.31,14165.73 ; P3.1@13166.31,14048.33 R44.1@13166.31,14165.73 ; R44.1@13168.91,14168.33 R44.1@13166.31,14165.73
  Top Layer w40: 12630,14240 12630,15499
  Top Layer w160: CT2.4@12934.13,15650 12934.13,16504 12934.13,16744.13
  Bottom Layer w20: C48.2@12903.72,13968.33 12903.72,14100.73 12952.98,14150 13037.31,14150 v2(13040,14150)
BN_D: D9.3 D40.2 Q5.2 T7.1 | length 467.7
  Top Layer w40: D9.3@9310,16555 9310,16536 9310,16099 D40.2@9314,16095
  Bottom Layer w130: D9.3@9315,16530 D9.3@9315,16536
BN_G: Q5.1 R22.2 R60.1 R61.1 | length 3531.8
  Top Layer w20: R60.1@9350,14542.4 R61.1@9470,14542.4 9470,14642.6 R22.2@9477.4,14650 9477.4,14737.4 9625,14885 9625,17890
BP15V+: D19.1 D21.1 P4.2 | length 385.1
  Top Layer w20: P4.2@10734,13890 10734,13771.6 D19.1@10735.6,13770
  Bottom Layer w20: D21.1@10546,13770 10546,13831 10605,13890 P4.2@10725,13890